# EAGLE board Smart manhole v9 (EAGLE 9.7.0)
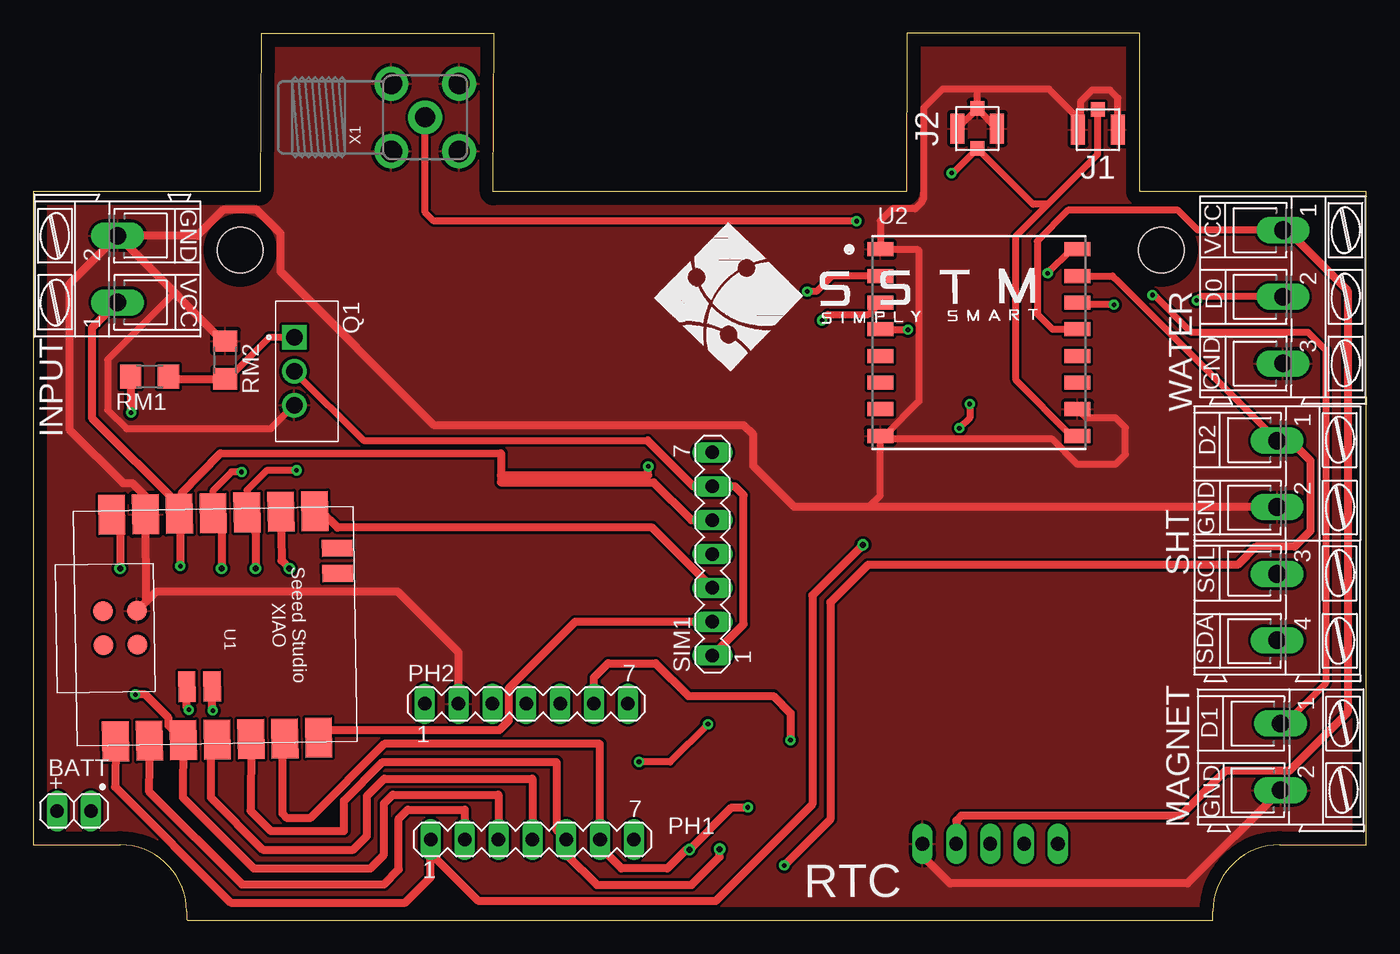
[diagram p0: board, top side]
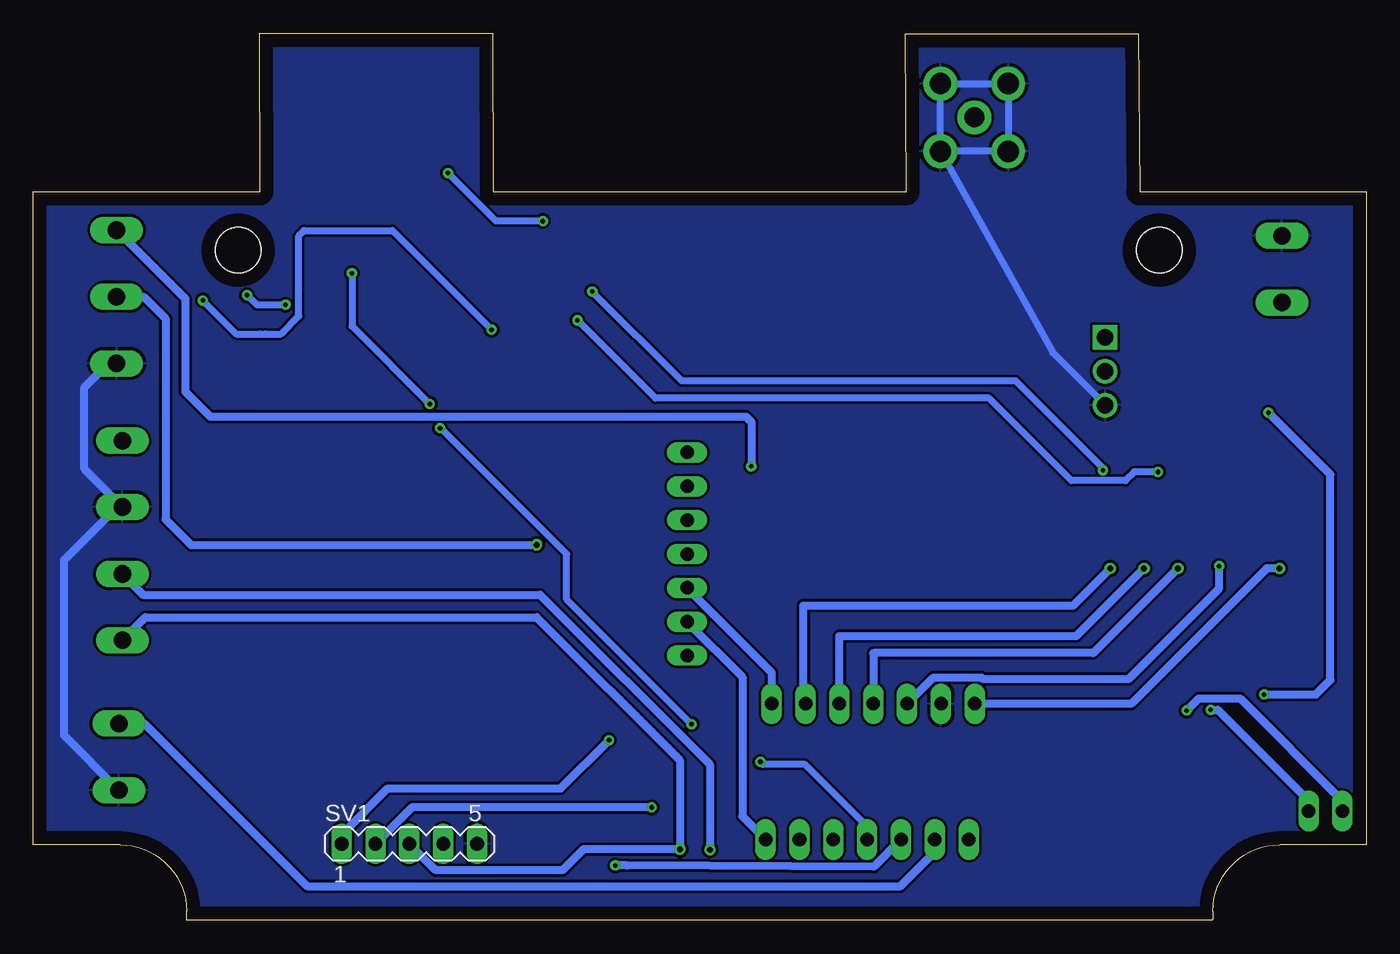
[diagram p1: board, bottom side, seen from below]

Size 100 x 66.55 mm. Coordinates in mm from the lower left corner, seen from the top.
Outline: 93.5,5.66 100,5.66 100,54.66 83,54.66 83.03,66.55 65.53,66.55 65.5,54.66 34.5,54.66 34.58,66.51 17.08,66.51 17,54.66 0,54.66 0,5.66 6.5,5.66 arc-90 11.5,0.66 11.5,0.08 11.58,0 88.5,0 88.5,0.66 arc-90 93.5,5.66
Copper layers (1*16): Top / Bottom
Stack-up Default Layer Stack: Top User Defined 0.035mm / Dielectric-1 User Defined 1.5mm / Bottom User Defined 0.035mm
Design rules: minimum copper width class=1 14mil, minimum copper width class=2 10mil, minimum copper width class=0 8mil, minimum copper width 6mil, minimum drill size 0.35mm, minimum drill size class=2 10mil, minimum drill size class=0 10mil, minimum drill size class=1 6mil, copper clearance class=2 to class=2 8mil, copper clearance class=1 to class=1 6mil, copper clearance class=0 to class=0 6mil, copper clearance wire_polygon to wire_polygon 6mil, copper clearance wire_polygon to pad_smd 6mil, copper clearance wire_polygon to via 6mil, copper clearance pad_smd to pad_smd 6mil, copper clearance pad_smd to via 6mil, copper clearance via to via 6mil, copper clearance smd to pad (same net) 6mil, copper clearance smd to via (same net) 6mil, copper clearance smd to smd (same net) 6mil, dimension clearance 40mil, via restrict clearance 0mil, restrict clearance 0mil, drill distance 6mil, keepout clearance 0mil
Net classes: 0 default: width 0.203 mm, drill 0.254 mm, clearance 0.152 mm; 1 ac: width 0.356 mm, drill 0.152 mm, clearance 0.152 mm; 2 power: width 0.254 mm, drill 0.254 mm, clearance 0.203 mm
Holes 3.43 mm at 84.64,50.28 15.51,50.28

## Footprints (pad centres in the part's own frame; a part is rotated, then mirrored left to right if it is on the bottom)
1X02 = drill 1.016 long: 1 -1.27,0; 2 1.27,0
AK300/2 = drill 1.321 long: 1 -2.515,0; 2 2.489,0
U.FL-R-SMT-1(XX) = smd 1.05 x 1.1: 1 0,1.525 | smd 1.05 x 2.25: 2 -1.5,0; 3 1.5,0
A-1JB = smd 1.1 x 1.05: 1 1.5,0; 2_1 -1.5,0 | smd 2.25 x 1.05: 2_0 0,1.475; 2_2 0,-1.475
MA07-1 = drill 1.016 long: 1 -7.62,0; 2 -5.08,0; 3 -2.54,0; 4 0,0; 5 2.54,0; 6 5.08,0; 7 7.62,0
TO254P1054X469X1930-3 = drill 1.23 pad 1.85 square: 1 -2.54,-0.94 | drill 1.23 pad 1.85: 2 0,-0.94; 3 2.54,-0.94
R1206 = smd 1.6 x 1.803: 1 -1.422,0; 2 1.422,0
CON-PTR500_AK300/4 = drill 1.321 long: 1 -7.493,0; 2 -2.515,0; 3 2.515,0; 4 7.493,0
MA05-1 = drill 1.016 long: 1 -5.08,0; 2 -2.54,0; 3 0,0; 4 2.54,0; 5 5.08,0
XIAO-NRF52840/SENSE-MODULE14P-2.54-21X17.8MM = smd 3 x 2: 1 -8.5,7.62; 2 -8.5,5.08; 3 -8.5,2.54; 4 -8.5,0; 5 -8.5,-2.54; 6 -8.5,-5.08; 7 -8.5,-7.62; 8 8.5,-7.62; 9 8.5,-5.08; 10 8.5,-2.54; 11 8.5,0; 12 8.5,2.54; 13 8.5,5.08; 14 8.5,7.62 | smd 1.5 x 1.5: 15 -1.27,8.39; 16 1.27,8.39; 17 -1.27,5.85; 18 1.27,5.85 | smd 1.3 x 2.3: 19 3.8,-9.25; 20 5.7,-9.25 | smd 2.3 x 1.3: 21 -4.5,2.2; 22 -4.5,0.3
XCVR_RFM95W-868S2 = smd 1.95 x 1.05: 1 -7.4,7; 2 -7.4,5; 3 -7.4,3; 4 -7.4,1; 5 -7.4,-1; 6 -7.4,-3; 7 -7.4,-5; 8 -7.4,-7; 9 7.4,-7; 10 7.4,-5; 11 7.4,-3; 12 7.4,-1; 13 7.4,1; 14 7.4,3; 15 7.4,5; 16 7.4,7
CON-PTR500_2_AK300/3 = drill 1.321 long: 1 -5.004,0; 2 0,0; 3 5.004,0
SMA90_DIP = drill 1.5 pad 2.54: ANTENNA 0,0 | drill 1.6 pad 2.54: GND1 -2.54,2.54; GND2 2.54,2.54; GND3 -2.54,-2.54; GND4 2.54,-2.54

## Placement (x,y rotation side)
BATT  PINHD-1X2  [1X02]  3.05,8.2 0 top
INPUT  [AK300/2]  6.32,48.87 90 top
J1  UMC-JACK  [U.FL-R-SMT-1(XX)]  79.88,59.32 0 top
J2  UMC-JACK  [A-1JB]  70.82,59.41 270 top
MAGNET  [AK300/2]  93.59,12.25 270 top
PH1  [MA07-1]  37.44,6.06 0 top
PH2  [MA07-1]  36.98,16.24 0 top
Q1  IRLZ44N  [TO254P1054X469X1930-3]  20.52,41.19 270 top
RM1  100  [R1206]  8.73,40.81 180 top
RM2  10k  [R1206]  14.41,42.04 270 top
SHT  [CON-PTR500_AK300/4]  93.32,28.5 270 top
SIM1  [MA07-1]  50.95,27.48 90 top
SV1  [MA05-1]  71.79,5.73 0 bottom
U1  XIAO-NRF52840/SENSE  [XIAO-NRF52840/SENSE-MODULE14P-2.54-21X17.8MM]  13.64,22.05 91 top
U2  RFM95W-868S2  [XCVR_RFM95W-868S2]  70.95,43.35 0 top
U$2  LOGO5  [LOGO5]  46.08,40.96 1 top
WATER  [CON-PTR500_2_AK300/3]  93.76,46.78 270 top
X1  [SMA90_DIP]  29.4,60.24 90 top

## Library data of the parts
BATT = Connector; CATEGORY: Headers; DESCRIPTION: Header, Straight, 2 Position; MANUFACTURER: Generic; MPN: Generic; OPERATING_TEMPERATURE: Generic; PART_STATUS: Active; PITCH: 0.100" (2.54mm); ROHS_COMPLIANCE: Generic; SERIES: Generic; SUB-CATEGORY: Headers, Male Pins; TYPE: Board to Board or Cable, Unshrouded, Through Hole, Straight
INPUT MAGNET = con-ptr500; OC_FARNELL: unknown; OC_NEWARK: unknown
J1 = Connector; CATEGORY: RF Connectors / Coaxial Connectors; DESCRIPTION: Ultra Small Surface Mount Coaxial Connectors; MANUFACTURER: Hirose Electric Co Ltd; MPN: U.FL-R-SMT-1(01); OPERATING_TEMPERATURE: -40˚C to +90˚C; PART_STATUS: Active; PITCH: -; ROHS_COMPLIANCE: RoHS Compliant; SERIES: U.FL; SUBCATEGORY: RF Interconnects; TYPE: Receptacle, Male Pin,Surface Mount
J2 = Connector; CATEGORY: RF Connectors / Coaxial Connectors; DESCRIPTION: RF Connectors / Coaxial Connectors AMC PCB JACK S/M T&R U.FL Compatible; MANUFACTURER: Amphenol RF; MPN: A-1JB; OPERATING_TEMPERATURE: 40°C TO +90°C; PART_STATUS: Active; PITCH: -; ROHS_COMPLIANCE: RoHS3 Compliant; SERIES: AMC; SUBCATEGORY: RF Connectors / Coaxial Connectors; TYPE: Jack, Male Pin, Surface Mount
PH1 PH2 SIM1 SV1 = con-lstb; OC_FARNELL: unknown; OC_NEWARK: unknown
Q1 = IRLZ44N; AVAILABILITY: Not in stock; CHECK_PRICES: https://www.snapeda.com/parts/IRLZ44N/Infineon/view-part/?ref=eda; DESCRIPTION: N-Channel 55 V 47A (Tc) 3.8W (Ta), 110W (Tc) Surface Mount D2PAK; MF: Infineon Technologies; MP: IRLZ44N; PACKAGE: TO-220 Infineon; PRICE: None; SNAPEDA_LINK: https://www.snapeda.com/parts/IRLZ44N/Infineon/view-part/?ref=snap
RM1 RM2 = eagle-ltspice; SPICEMODEL: NONE; SPICEPREFIX: R
SHT WATER = Coolteck_eeprom_V2esp+v12; OC_FARNELL: unknown; OC_NEWARK: unknown
U1 = Seeed Studio XIAO Series
U2 = RFM95W-868S2; AVAILABILITY: Warning; DESCRIPTION: General ISM < 1GHz LoRa™ Transceiver Module 868MHz Antenna Not Included Surface Mount; MF: RF; MP: RFM95W-868S2; PACKAGE: SMD-16 Hope Microelectronics; PRICE: None; PURCHASE-URL: https://pricing.snapeda.com/search/part/RFM95W-868S2/?ref=eda
U$2 = bagylib
X1 = adafruit

## Nets
3.3: INPUT.1 PH2.3 SIM1.5 SV1.4 U1.12 U2.13 WATER.1
5V [ac]: PH2.1 U1.14
A0: PH1.1 U1.1 U2.4 WATER.2
A1: MAGNET.1 PH1.2 U1.2 U2.14
A2: PH1.3 RM1.2 SHT.1 U1.3 U2.15
A3: PH1.4 U1.4 U2.16
ANT: J1.1 J2.1 U2.9 X1.ANTENNA
CS2: U2.5
GND [power]: INPUT.2 J1.2 J1.3 J2.2_0 J2.2_1 J2.2_2 MAGNET.2 PH2.2 Q1.3 RM2.1 SHT.2 SV1.5 U1.13 U1.18 U2.1 U2.8 U2.10 WATER.3 X1.GND1 X1.GND2 X1.GND3 X1.GND4
MISO2: PH2.5 U1.10 U2.2
MOSI2: PH2.4 U1.11 U2.3
N$1: BATT.2 U1.21
N$2: BATT.1 U1.22
N$3: Q1.1 RM1.1 RM2.2
N$6 [power]: Q1.2 SIM1.1 SIM1.6
NC: U2.6
RX: PH2.7 SIM1.3 U1.8
SCK: PH2.6 SV1.1 U1.9
SCL: PH1.6 SHT.3 SV1.2 U1.6
SDA: PH1.5 SHT.4 SV1.3 U1.5
TX: PH1.7 SIM1.2 U1.7

## Tracks (layer width: path | path; a pad name or v marks a point on that pad's centre or on a via)
3.3  (via drill 0.35)
  Top 0.508: WATER.1 87.36,51.79 85.87,53.27 77.63,53.27 75.31,50.96 75.31,45.5 76.46,44.35 U2.13
  Top 0.61: v11.02,26.58 11.02,30.5 U1.12 | 35.08,33.39 46.13,33.4 v46.13,34.06 | U1.12 11.15,30.67 11.15,32.07 14.04,35.03 35.08,35.05 35.08,33.39 | U1.12 11,31.09 4.4,37.7 4.4,44.43 INPUT.1 | SIM1.5 49.37,30.02 46.53,32.86 35.08,32.86 35.08,33.39 | WATER.1 94.06,51.79 98.62,47.23 98.62,15.61 94.21,11.21 89.43,11.21 86.06,7.83 69.61,7.83 69.25,7.47 SV1.4
  Bottom 0.61: PH2.3 32.46,18.22 28.86,18.22 28.76,18.13 17.8,18.13 11.02,24.9 v11.02,26.58 | v46.13,34.06 46.13,37.39 46.53,37.79 86.72,37.79 88.6,39.67 88.6,46.64 WATER.1
5V  (via drill 0.45 pad 0.61)
  Top 0.61: U1.14 6.5,29.88 v6.5,26.4
  Bottom 0.61: v6.5,26.4 7.47,26.4 17.63,16.24 PH2.1
A0  (via drill 0.35, 0.45 pad 0.61)
  Top 0.508: v65.62,44.31 63.59,44.31 U2.4 | WATER.2 87.56,46.78 v87.29,46.51
  Top 0.61: v62.25,28.17 58.45,24.37 58.45,8.7 51.18,1.44 33.41,1.44 29.82,5.03 PH1.1 29.82,3.24 27.9,1.32 14.81,1.32 6.13,10 U1.1
  Bottom 0.508: v87.29,46.51 84.78,44 82.98,44 82.59,44 81.42,44 80.09,45.33 80.09,51.36 79.7,51.75 73.06,51.75 v65.62,44.31
  Bottom 0.61: WATER.2 91.72,46.78 90.08,45.14 90.08,30.08 88.17,28.17 v62.25,28.17
A1  (via drill 0.35)
  Top 0.508: MAGNET.1 93.95,14.76 97,17.81 97,42.76 95.64,44.11 86.88,44.11 84.09,46.91 v83.97,46.91 | v81.08,46.18 78.52,46.18 U2.14
  Top 0.61: PH1.2 32.36,8.29 28.1,8.29 27.42,7.61 27.42,3.81 26.3,2.69 15.65,2.69 8.67,9.68 U1.2
  Bottom 0.508: v83.97,46.91 83.24,46.18 v81.08,46.18
  Bottom 0.61: MAGNET.1 91.67,14.76 79.46,2.55 34.94,2.55 32.36,5.13 PH1.2
A2  (via drill 0.35)
  Top 0.508: SHT.1 81.41,47.91 80.97,48.35 U2.15
  Top 0.61: PH1.3 34.9,9.42 26.97,9.42 26.32,8.76 26.32,4.91 25.29,3.89 16.54,3.89 11.21,9.22 U1.3 10.15,14.61 10.15,15.17 8.38,16.94 v7.65,16.94 | SHT.1 94.31,35.99 95.81,34.49 95.81,29.21 94.64,28.04 91.73,28.04 90.37,26.68 62.63,26.68 59.8,23.85 59.8,7.57 v56.34,4.11 | RM1.2 7.3,38.12 v7.34,38.09
  Bottom 0.61: v56.34,4.11 55.44,4.11 36.94,4.02 PH1.3 | v7.65,16.94 3.77,16.94 2.69,18.02 2.69,33.44 v7.34,38.09
A3  (via drill 0.35)
  Top 0.508: v76.1,48.54 77.91,50.35 U2.16 | v70.25,38.74 70.25,37.69 v69.49,36.92 | v50.61,14.71 47.78,11.88 v45.45,11.88
  Top 0.61: PH1.4 37.44,10.62 26.32,10.62 25.03,9.33 25.03,6.32 24,5.3 17.22,5.3 13.33,9.19 13.33,13.14 U1.4
  Bottom 0.508: PH1.4 37.44,7.03 42.1,11.69 45.26,11.69 v45.45,11.88 | v50.61,14.71 59.99,24.08 59.99,27.48 69.43,36.92 v69.49,36.92 | v70.25,38.74 76.1,44.58 v76.1,48.54
ANT  (via drill 0.35)
  Top 0.508: U2.9 77.9,36.35 73.72,40.52 73.72,51.33 76.12,53.73 | J1.1 79.86,60.83 79.86,57.47 76.12,53.73 | 76.12,53.73 75,53.73 J2.1 68.98,56.07 v68.89,56.07 | v61.76,52.46 30.04,52.46 29.4,53.11 X1.ANTENNA
  Bottom 0.508: v61.76,52.46 65.29,52.46 v68.89,56.07
GND
  Top 0.508: 62.67,31.01 63.55,31.89 U2.8 63.86,36.35 | 78.12,38.35 U2.10 79.01,37.69 81.22,37.69 81.94,36.97 81.94,34.95 81.22,34.23 78.31,34.23 76.4,36.14 64.08,36.14 63.86,36.35 | 63.86,36.35 66.45,38.94 66.45,50.22 66.32,50.35 U2.1 63.55,52.49 64.45,53.39 66.16,53.39 66.7,53.92 66.7,54.06 66.78,54.14 66.78,58.68 66.79,60.94 68.22,62.37 70.93,62.37 | J1.3 81.38,61.7 80.79,62.29 79.42,62.29 78.57,61.43 78.57,59.51 J1.2 78.38,60.19 76.2,62.37 70.93,62.37 | J2.2_0 70.82,60.88 J2.2_1 | J2.2_1 69.34,59.43 J2.2_2 | J2.2_1 70.82,62.27 70.93,62.37 | 10.57,47.12 10.57,47.05 5.58,42.06 5.58,38.3 6.99,36.88 17.82,36.88 Q1.3
  Top 0.61: 8.6,30.92 8.6,30.63 U1.13 | INPUT.2 2.69,47.74 2.69,36.83 6.73,32.79 7.43,32.79 8.46,31.76 U1.13 | PH2.2 31.9,20.11 27.36,24.65 9.17,24.62 U1.18 8.46,23.93 U1.13 | 92.47,31.01 SHT.2 62.67,31.01 57.1,31.01 54.02,34.1 54.02,36.43 53.31,37.14 30.08,37.14 18.54,48.68 18.54,51.54 16.77,53.31 14.25,53.31 12.3,51.36 INPUT.2 | RM2.1 14.22,43.47 11.4,46.29 10.57,47.12 INPUT.2 | MAGNET.2 86.58,2.76 68.78,2.76 66.71,4.83 SV1.5
  Bottom 0.508: Q1.3 23.52,42.59 X1.GND3 | X1.GND3 X1.GND4 X1.GND2 X1.GND1 X1.GND3
  Bottom 0.61: WATER.3 94.38,41.78 96.18,39.98 96.18,33.87 SHT.2 93.71,31.01 97.72,27 97.72,13.89 MAGNET.2
  pour Top: -6.04,69.08 -6.04,-11.66 -5.6,-12.1 108.7,-12.1 117.77,-3.03 117.77,67.76 116.22,69.3 -5.82,69.3
  pour Bottom: -6.99,70.3 -6.99,-16.47 -7.76,-17.24 106.09,-17.24 121.37,-1.95 121.37,67.24 116.41,72.21 -6.61,72.21 -6.99,71.82 -6.61,71.82
MISO2  (via drill 0.35, 0.45 pad 0.61)
  Top 0.508: U2.2 59.91,48.35 58.74,47.19 v58.06,47.19 | v19.75,33.76 19.72,33.73 17.5,33.73 16.03,32.27 U1.10 16.66,29.97 16.66,29.07
  Top 0.61: 16.66,30 16.66,29.07 v16.66,26.4
  Bottom 0.508: v19.75,33.76 19.75,33.93 26.3,40.49 51.36,40.49 v58.06,47.19
  Bottom 0.61: v16.66,26.4 21.74,21.32 39.52,21.32 PH2.5
MOSI2  (via drill 0.35, 0.45 pad 0.61)
  Top 0.508: U2.3 62.65,45.45 59.62,45.45 v59.18,45.02 | v15.62,33.64 14.87,33.64 13.5,32.26 U1.11 14.12,29.92 14.12,29.43
  Top 0.61: 14.12,29.97 14.12,29.43 v14.12,26.4
  Bottom 0.508: v15.62,33.64 17.41,33.64 18.06,32.98 22.1,32.98 28.3,39.17 53.34,39.17 v59.18,45.02
  Bottom 0.61: v14.12,26.4 20.47,20.05 36.98,20.05 PH2.4
N$1  (via drill 0.35)
  Top 0.61: v11.67,15.79 11.52,15.94 U1.21
  Bottom 0.61: v11.67,15.79 11.15,15.79 4.32,8.96 BATT.2
N$2  (via drill 0.35)
  Top 0.61: v13.46,15.73 13.42,15.78 U1.22
  Bottom 0.61: v13.46,15.73 12.57,16.63 9.44,16.63 1.78,8.96 BATT.1
N$3
  Top 0.508: Q1.1 17.68,43.73 14.57,40.62
  Top 0.61: 14.57,40.62 RM2.2 10.33,40.62 RM1.1
N$6
  Top 0.508: 46.09,36 24.77,36 Q1.2
  Top 0.61: SIM1.1 53.3,22.2 53.3,31.9 52.63,32.56 SIM1.6 49.52,32.56 46.09,36
RX
  Top 0.61: SIM1.3 46.44,29.46 22.82,29.46 21.59,30.68 U1.8
  Bottom 0.61: PH2.7 44.6,18.59 SIM1.3
SCK  (via drill 0.35, 0.45 pad 0.61)
  Top 0.61: U1.9 18.62,26.98 v19.2,26.4 | PH2.6 42.06,18.21 43.13,19.27 46.69,19.27 49.14,16.82 55.52,16.82 56.81,15.53 v56.81,13.5
  Bottom 0.61: v19.2,26.4 21.98,23.62 42.22,23.62 42.22,16.4 PH2.6 | v56.81,13.5 60.43,9.88 73.41,9.88 76.87,6.43 SV1.1
SCL  (via drill 0.35, 0.45 pad 0.61)
  Top 0.61: U1.6 18.7,13.49 18.7,8.01 19.06,7.66 20.75,7.66 26.33,13.23 42.52,13.23 PH1.6 42.52,5.5 44.12,3.9 47.57,3.9 48.97,5.3 v49.23,5.3 52.4,8.47 v53.61,8.47
  Bottom 0.61: SHT.3 91.77,24.43 61.96,24.43 49.23,11.69 v49.23,5.3 | v53.61,8.47 71.59,8.47 SV1.2
SDA  (via drill 0.45 pad 0.61)
  Top 0.61: U1.5 16.29,8.22 17.81,6.69 21.46,6.69 23.31,6.69 23.31,8.96 26.22,11.88 39.24,11.88 39.24,6.8 PH1.5 39.98,4.95 42.28,2.64 49.39,2.64 51.49,4.75 v51.49,5.33
  Bottom 0.61: SHT.4 91.6,22.73 62.24,22.73 51.49,11.98 v51.49,5.33 58.71,5.33 60.28,3.75 69.81,3.75 SV1.3
TX
  Top 0.61: U1.7 21.98,14.26 34.95,14.26 35.66,14.97 35.66,17.4 40.66,22.4 SIM1.2
  Bottom 0.61: SIM1.2 46.8,18.25 46.8,7.81 PH1.7

## Text on the board
NamesTop: GND | VCC | VCC | D0 | GND | D2 | GND | SCL | SDA | D1 | + | GND | RTC